# Altium PCB OpenBeacon.PcbDoc
Units mm, origin at the board's own origin, x right, y up, seen from the top; angles counter-clockwise.
Board outline 30 x 30 mm, 2 copper layers (Top Layer, Bottom Layer), stack 0.981 mm thick; 41 components, 33 nets, 159 pads, 58 vias.
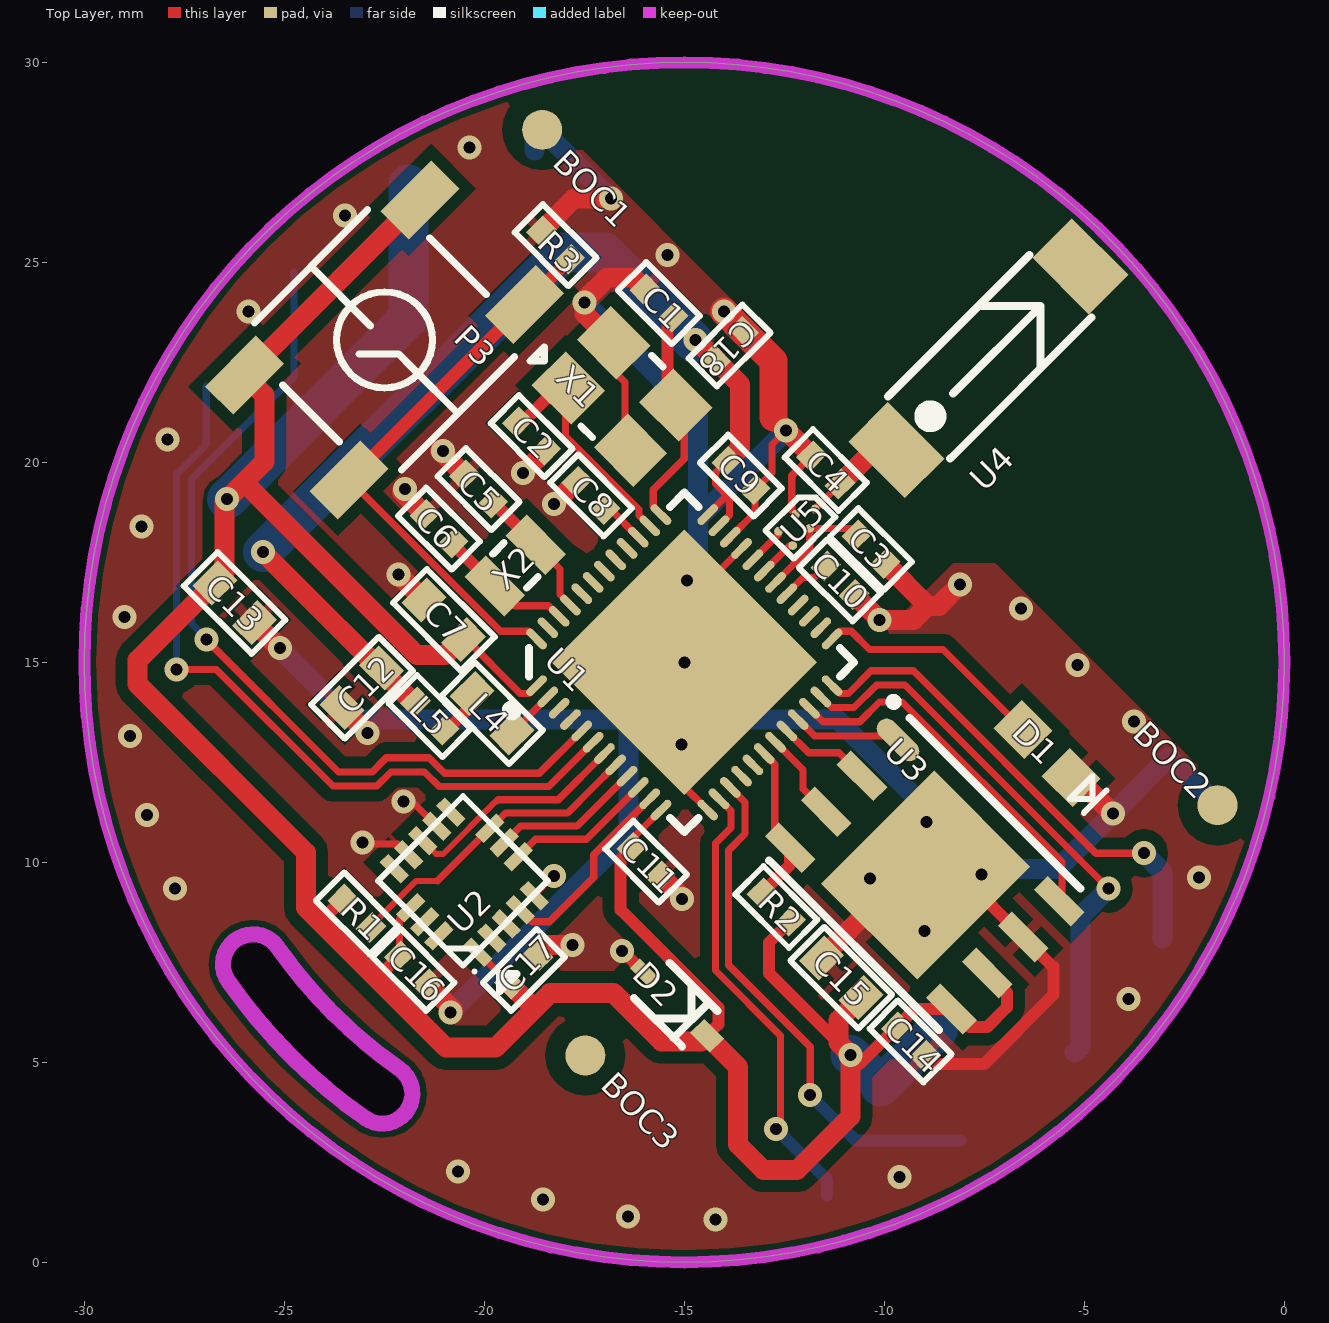
[diagram p0: Top Layer view]
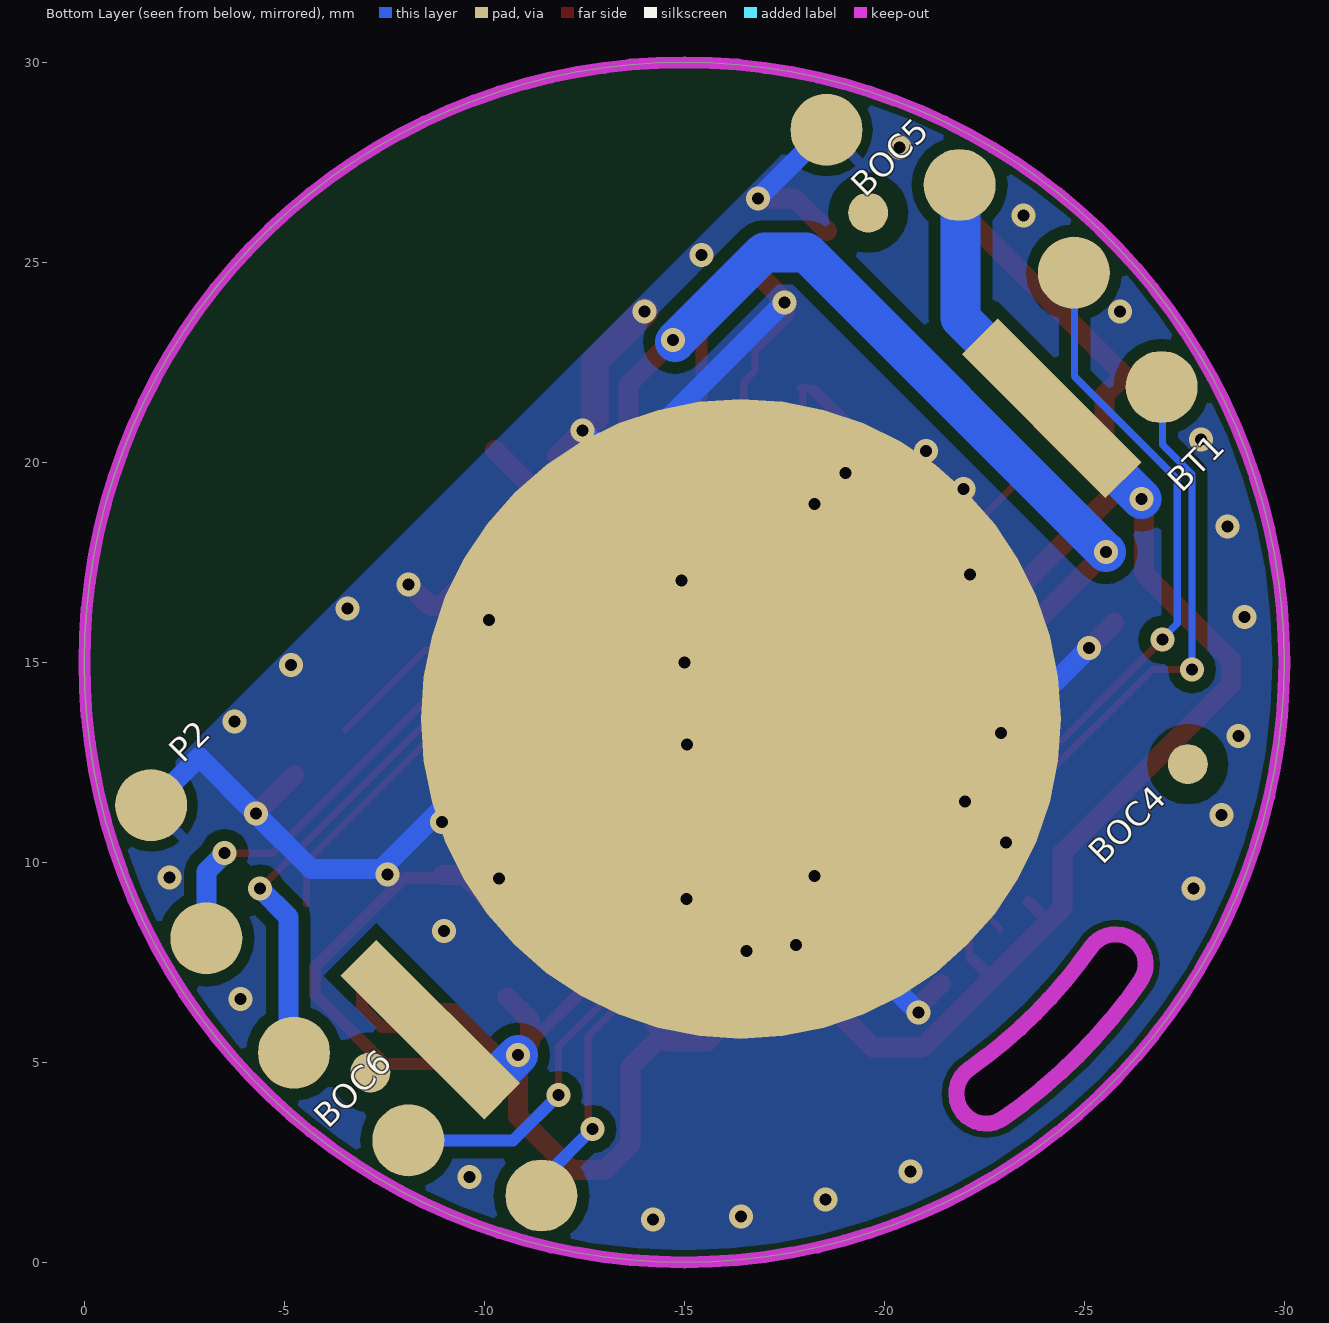
[diagram p1: Bottom Layer view, seen from below]

## Layer stack, top to bottom
Top Solder: solder mask 0.0102, Solder Resist, Dk 3.5
Top Layer: signal copper 0.0356
Dielectric 1: core 0.91, FR-4, Dk 4.2
Bottom Layer: signal copper 0.0356
Bottom Solder: solder mask 0.0102, Solder Resist, Dk 3.5

## Board outline
-15,0 cw(c-15,15) -30,15 cw(c-15,15) -15,30 cw(c-15,15) 0,15 cw(c-15,15)
cut-out: -26.475,7.175 -26.55,7.425 -26.525,7.675 -26.425,7.9 -26.275,8.05 -26.05,8.175 -25.85,8.225 -25.55,8.175 -25.3,8.05 -24.45,6.975 -23.9,6.35 -23.225,5.7 -22,4.75 -21.85,4.525 -21.8,4.25 -21.85,3.95 -21.95,3.725 -22.1,3.6 -22.25,3.5 -22.55,3.45 -22.775,3.525 -23,3.625 -23.55,4 -24.3,4.65 -25.25,5.6 -26,6.475

## Design rules (kind name [scope] priority, off if disabled: settings)
Clearance Clearance_BOC [InComponent('BOC1') OR InComponent('BOC2') OR InComponent('BOC3') OR InComponent('BOC4') OR InComponent('BOC5') OR InComponent('BOC6') vs IsRegion] p1: gap=0.5
Clearance Clearance_plane [(OnLayer('Keep-Out Layer')) vs IsRegion] p2: gap=0.15
Clearance Clearance_PWR [IsRegion] p3: gap=0.3
Clearance Clearance_ACC [InNet('ACC_/CS') OR InNet('ACC_INT1') vs InComponent('U2')] p4: gap=0.15
Clearance [All] p5: gap=0.15
ComponentClearance ComponentClearance_PROG [InComponent('BT1') vs InComponent('P2')] p1: gap=0.2 collisioncheckmode=3 verticalgap=0.2 showdistances=FALSE
ComponentClearance [All] p2: gap=0.254 collisioncheckmode=3 verticalgap=0.254 showdistances=FALSE
Height Height_TOP [(OnLayer('Top Layer'))] p1: minheight=0 maxheight=12.7 prefheight=1
Height Height_BOTTOM [(OnLayer('Bottom Layer'))] p2: minheight=0 maxheight=12.7 prefheight=4.06
Height [All] p3: minheight=0 maxheight=1 prefheight=1
HoleSize [All] p1: absolutevalues=TRUE maxlimit=2.54 minlimit=0.3 maxpercent=80.000 minpercent=20.000
MinimumSolderMaskSliver [All] p1 off: minsoldermaskwidth=0.075
PolygonConnect PolygonConnect_BAT [InNet('GND') AND InComponent('BT1')] p1: connectstyle=Direct reliefconductorwidth=0.254 reliefentries=4 polygonreliefangle="90 Angle" airgapwidth=0.254
PolygonConnect PolygonConnect_Via [IsVia] p2: connectstyle=Direct reliefconductorwidth=0.254 reliefentries=4 polygonreliefangle="90 Angle" airgapwidth=0.254
PolygonConnect [All] p3: connectstyle=Relief reliefconductorwidth=0.254 reliefentries=4 polygonreliefangle="90 Angle" airgapwidth=0.254
RoutingVias [All] p1: holewidth=0.3 width=0.6 viastyle="Through Hole" minholewidth=0.3 minwidth=0.6 maxholewidth=0.3 maxwidth=0.6
SilkToSilkClearance [All] p1 off: silktosilkclearance=0.05
SilkToSolderMaskClearance [IsPad] p1 off: minsilkscreentomaskgap=0.05 clearancetoexposedcopper=TRUE
SolderMaskExpansion SolderMaskExpansion_Via [IsVia] p1: expansion=-0.3
SolderMaskExpansion [All] p2: expansion=0.075
Width Width_small [InNet('ACC_/CS') OR InNet('ACC_INT1')] p1: maxlimit=1 minlimit=0.15 preferedwidth=0.18
Width [All] p2: maxlimit=1 minlimit=0.18 preferedwidth=0.3
23 further rules are at their usual default settings.

## Components (designator, comment, footprint, x,y, rotation, side; value= is the part's Value field where it differs from the comment)
BOC1 "Testpad" TESTPAD_1MM -18.554,28.312 r45 top
BOC2 "Testpad" TESTPAD_1MM -1.67,11.428 r45 top
BOC3 "Testpad" TESTPAD_1MM -17.475,5.171 r45 top
BOC4 "Testpad" TESTPAD_1MM -27.587,12.454 r135 bottom
BOC5 "Testpad" TESTPAD_1MM -19.596,26.243 r135 bottom
BOC6 "Testpad" TESTPAD_1MM -7.151,4.747 r135 bottom
BT1 "Battery Cell Holder" BAT-Holder_3034without-battery -16.414,13.586 r315 bottom
C1 "12pF" 0402[1005] -15.636,23.98 r135 top
C2 "12pF" 0402[1005] -18.818,20.657 r315 top
C3 "2.2nF" 0402[1005] -10.333,17.828 r315 top
C4 "0.8pF" 0402[1005] -11.464,19.808 r135 top
C5 "Cap 20pF" 0402[1005] -20.144,19.331 r315 top
C6 "Cap 20pF" 0402[1005] -21.134,18.341 r315 top
C7 "4.7uF" 0603[1608]_a -21.01,16.061 r135 top
C8 "100nF" 0402[1005] -17.333,19.172 r135 top
C9 "1nF" 0402[1005] -13.586,19.667 r315 top
C10 "47nF" 0402[1005] -11.111,17.051 r315 top
C11 "100nF" 0402[1005] -15.955,10.015 r315 top
C12 "1.0uF" 0603[1608]_a -23.061,14.364 r225 top
C13 "4.7µF" 0603[1608]_a -26.243,16.485 r135 top
C14 "100nF" 0402[1005] -9.343,5.525 r315 top
C15 "4.7uF" 0603[1608]_a -11.076,7.116 r135 top
C16 "100nF" 0402[1005] -21.771,7.31 r135 top
C17 "100nF" 0402[1005] -19.013,7.31 r45 top
C18 "100nF" 0402[1005] -13.869,22.92 r45 top
D1 "LED blue" LED_0603 -5.931,12.72 r135 top
D2 "Schottky" SC-90A -15.212,6.444 r315 top
L4 "10uH" 0603[1608]_a -19.808,13.727 r135 top
L5 "15nH" 0402[1005] -21.364,13.656 r135 top
P2 "PROG" HDR1X9_round_custom-SMD_without-3D -15,15 r135 bottom
P3 "Taktil_PTS252" taktil_PTS525 -22.495,23.061 r225 top locked
R1 "12k" 0402[1005] -23.185,8.724 r135 top
R2 "12k" 0402[1005] -12.702,8.884 r135 top
R3 "12k" 0402[1005] -18.217,25.43 r135 top
U1 "nRF51822" QFN-48 -15,15 r45 top locked
U2 "LIS3DH" LGA-16 -20.498,9.502 r135 top
U3 "AT45DB641E" UDFN-8MA1 -8.99,9.697 r315 top
U4 "ANT-2.54-CHP" ANT-CHP_rainsun -9.697,20.303 r45 top
U5 "BAL-NRF01D3" BAL-NRF01D3 -12.101,18.465 r45 top
X1 "XTAL_4Pin" SMD3225 -16.556,21.647 r315 top
X2 "XTAL-2pin" ABS06 -19.225,17.422 r45 top

## Footprints (in the part's own frame and the unit in brackets; to place one, negate y for a bottom-side part, rotate by r counter-clockwise, add the part's x,y. Pads: shape width x height; smd on the part's side, far side on the other; paste and mask are expansions set on the pad)
0402[1005] [mm] "0402 (1005), body 1.0 x 0.5 mm"
  rect 0.5x0.6 smd: 1(-0.5,0) 2(0.5,0)
  silkscreen extent -0.95,-0.5 0.95,0.5, body extent -0.5,-0.25 0.5,0.25, height 0.35
0603[1608]_a [mm] "Chip Capacitor; Body 1.6 x 0.8 mm (LxW typ)"
  rect 0.7x0.9 smd: 1(-0.7,0) 2(0.7,0)
  silkscreen extent -1.2,-0.6 1.2,0.6, body extent -0.8,-0.4 0.8,0.4, height 0.8
ABS06 [mm] "Low Profile Crystal 2.0 x 1.2 mm"
  rect 0.75x1.4 smd: 1(-0.725,0) 2(0.725,0)
  silkscreen extent -0.2,-0.6 0.2,0.6, body extent -1,-0.6 1,0.6, height 0.6
ANT-CHP_rainsun [mm] "ANT-2.45-CHP"
  rect 1.4x2 smd: 1(0,0) 2(6.5,0)
  silkscreen extent 0.8,-1.1 5.8,1.1, body extent -0.25,-1.25 6.75,1.25, height 1
BAL-NRF01D3 [mm]
  round 0.22 smd paste+0 mask+0.05: A2(0.085,0.25) A3(-0.519,0.25) B1(0.518,0) C2(0.085,-0.25) C3(-0.519,-0.25)
  silkscreen extent -0.74,-0.5 0.74,0.5, body extent -0.75,-0.5 0.75,0.5, height 0.63
BAT-Holder_3034without-battery [mm] "Coin Cell 20mm Holder from Keystone"
  round 16 smd paste-9: M(0,0)
  rect 1.27x5.08 smd: P1(-10.985,0) P2(10.985,0)
  body extent -11.5,-7.74 11.74,8.74, height 4.1
HDR1X9_round_custom-SMD_without-3D [mm] "SMD Pads; 1x9 Position, custom round"
  round 1.8 smd paste-0.9: 1(-11.951,6.9) 2(-13.33,3.572) 3(-13.8,0) 4(-13.33,-3.572) 5(-11.951,-6.9) 6(11.926,6.9) 7(13.305,3.572) 8(13.775,0) 9(13.305,-3.572)
  body extent -14.79,-7.9 14.77,7.9, height 5
LED_0603 [mm] "0603-Pol. SMD Chip LED, Body 1.6 x 0.8 mm (LxW typ)"
  rect 1.1x1 smd: A(0.85,0) C(-0.85,0)
  silkscreen extent -1.7,-0.4 -1.2,0.4, body extent -0.8,-0.4 0.8,0.4, height 0.8
LGA-16 [mm] "16-lead LGA"
  rect 0.75x0.3 smd: 1(-1.475,1) 2(-1.475,0.5) 3(-1.475,0) 4(-1.475,-0.5) 5(-1.475,-1) 9(1.475,-1) 10(1.475,-0.5) 11(1.475,0) 12(1.475,0.5) 13(1.475,1)
  rect 0.3x0.75 smd: 6(-0.5,-1.4) 7(0,-1.4) 8(0.5,-1.4) 14(0.5,1.4) 15(0,1.4) 16(-0.5,1.4)
  silkscreen extent -2.55,-1.5 1.55,1.5, body extent -1.45,-1.5 1.55,1.5, height 1
QFN-48 [mm] "QFN40P600X600X90-48N"
  oval 0.65x0.2 smd mask+0.075: 1(-3.025,2.2) 2(-3.025,1.8) 3(-3.025,1.4) 4(-3.025,1) 5(-3.025,0.6) 6(-3.025,0.2) 7(-3.025,-0.2) 8(-3.025,-0.6) 9(-3.025,-1) 10(-3.025,-1.4) 11(-3.025,-1.8) 12(-3.025,-2.2) 25(3.025,-2.2) 26(3.025,-1.8) 27(3.025,-1.4) 28(3.025,-1) 29(3.025,-0.6) 30(3.025,-0.2) 31(3.025,0.2) 32(3.025,0.6) 33(3.025,1) 34(3.025,1.4) 35(3.025,1.8) 36(3.025,2.2)
  oval 0.2x0.65 smd mask+0.075: 13(-2.2,-3.025) 14(-1.8,-3.025) 15(-1.4,-3.025) 16(-1,-3.025) 17(-0.6,-3.025) 18(-0.2,-3.025) 19(0.2,-3.025) 20(0.6,-3.025) 21(1,-3.025) 22(1.4,-3.025) 23(1.8,-3.025) 24(2.2,-3.025) 37(2.2,3.025) 38(1.8,3.025) 39(1.4,3.025) 40(1,3.025) 41(0.6,3.025) 42(0.2,3.025) 43(-0.2,3.025) 44(-0.6,3.025) 45(-1,3.025) 46(-1.4,3.025) 47(-1.8,3.025) 48(-2.2,3.025)
  rect 4.7x4.7 smd paste-2.5: 49(0,0)
  silkscreen extent -4.02,-3 3,3, body extent -3,-3 3,3, height 0.9
SC-90A [mm] "Schottky Barrier Diode"
  rect 0.7x0.35 smd: A(-1.1,0)
  rect 0.7x0.5 smd: C(1.1,0)
  silkscreen extent -0.85,-0.62 0.85,0.62, body extent -0.85,-0.62 0.85,0.62, height 0.7
SMD3225 [mm] "thin crystal"
  rect 1.4x1.2 smd: 1(-1.1,-0.8) 2(1.1,-0.8) 3(1.1,0.8) 4(-1.1,0.8)
  silkscreen extent -2.25,-1.25 0.2,1.25, body extent -1.6,-1.25 1.6,1.25, height 0.55
taktil_PTS525 [mm] "Microminiature Tact Switch for SMT"
  rect 1.8x1 smd: 1(-3.1,1.85) 2(3.1,1.85) 3(-3.1,-1.85) 4(3.1,-1.85)
  silkscreen extent -2.6,-2.6 2.6,2.6, body extent -2.6,-2.6 2.6,2.6, height 0.9
TESTPAD_1MM [mm] "Testpad 1mm"
  round 1 smd paste-0.6 mask+0.5: 1(0,0)
  body extent -0.5,-0.5 0.5,0.5, height 0.1
UDFN-8MA1 [mm] "MO-229 (JEDEC), body 6x5mm"
  rect 3.4x4 smd paste-2: 0(0.025,0.005)
  oval 1.3x0.5 smd: 1(-2.85,1.905)
  rect 1.3x0.5 smd: 2(-2.85,0.635) 3(-2.85,-0.635) 4(-2.85,-1.905) 5(2.85,-1.905) 6(2.85,-0.635) 7(2.85,0.635) 8(2.85,1.905)
  silkscreen extent -3.7,-2.5 3,2.6, body extent -3,-2.5 3,2.5, height 1

## Part data
BT1: library part Battery_Cell, "Battery Cell"
C1 C2 C3 C4 C5 C6 C7 C8 C9 C10 C11 C12 C14 C15 C16 C17 C18: library part "Cap Semi", "Capacitor (Semiconductor SIM Model)"
C13: library part C0603-4µ7, "Capacitor, X5R, ±10%"
D1: library part LED, "LED"
D2: library part Diode_Shottky, "Schottky barrier diode"
L4 L5: library part COIL, "Inductor / Spule"
P2: library part "Header 9", "Header, 9-Pin"
P3: "Taster"
R1 R2 R3: library part Res, "Resistor"
U2: "LIS3DH, MEMS digital output motion sensor"
U3: "serial interface Flash memory (1.7V-3.6V)"
U4: library part ANT-CHP, "ANT-2.54-CHP, 2.45GHz Ultra-Compact Chip Antenna"
U5: "ST BAL-NRF01D31"
X1: "ABM8 ceramic crystal"
X2: library part XTAL_2Pin, "Crystal"

## Via types
v1: diameter 0.6, hole 0.3, Top Layer to Bottom Layer, tented both sides, 58 vias

## Nets (pads, with @x,y where several pads share a name; then routed paths per layer and width w, separated by ;. In a path a pad name is that pad's centre, name@x,y a point inside that pad or via, vN(x,y) a via of type N, cw(c..) or ccw(c..) an arc to the next point about the centre after c; other vN are vias at no path point)
ACC_/CS: R1.1 U1.8 U2.8 | length 7.9
  Top Layer w0.15: R1.1@-22.902,8.3 -22.902,8.336 -21.7,9.538 -21.17,9.538
  Top Layer w0.18: -21.17,9.538 U2.8 -19.472,11.235 -17.917,11.235 -17.333,11.818 U1.8
ACC_INT1: U1.7 U2.11 | length 5.7
  Top Layer w0.15: U2.11@-21.523,10.528 -21.205,10.209 -21.028,10.209 -19.702,11.535 -19.685,11.535
  Top Layer w0.18: -19.685,11.535 -19.655,11.565 -18.153,11.565 U1.7
ACC_MISO: U1.9 U2.7 | length 3.8
  Top Layer w0.18: U2.7 -19.095,10.905 -17.681,10.905 U1.9
ACC_MOSI: U1.10 U2.6 | length 3.7
  Top Layer w0.18: U2.6 -18.718,10.575 -17.445,10.575 U1.10
ACC_SCK: U1.11 U2.4 | length 5
  Top Layer w0.18: U2.4@-19.119,8.83 -18.801,8.512 -18.376,8.512 -17.263,9.626 -17.263,10.192 U1.11
AIN2: P2.8 U1.5 | length 21.9
  Top Layer w0.18: v1(-26.95,15.566) -23.644,12.26 -22.803,12.26 -22.449,12.614 -21.382,12.614 -20.993,12.225 -18.624,12.225 U1.5
  Bottom Layer w0.18: v1(-26.95,15.566) -26.95,15.601 -27.321,15.972 -27.321,19.579 -24.758,22.142 P2.8@-24.758,24.758
AIN3: P2.9 U1.6 | length 19.8
  Top Layer w0.18: v1(-27.693,14.823) -26.703,14.823 -23.786,11.906 -22.69,11.906 -22.336,12.26 -21.495,12.26 -21.129,11.895 -18.388,11.895 U1.6
  Bottom Layer w0.18: v1(-27.693,14.823) -27.693,19.702 -26.951,20.444 P2.9@-26.951,21.9
ANT1: U1.32 U5.A3 | length 1
  Top Layer w0.18: U1.32 -12.644,18.204 U5.A3
ANT2: U1.31 U5.C3 | length 1
  Top Layer w0.18: U1.31 -12.362,17.921 U5.C3
AVDD: C9.1 C12.1 C18.1 L5.2 U1.35 U1.36 | length 26.5
  Top Layer w0.18: U1.36 -14.01,19.101 -13.869,19.101 ; U1.35 -13.869,18.677 -13.869,19.101 ; C9.1 -14.222,19.738 -14.222,19.455 -13.869,19.101
  Top Layer w0.5: v1(-25.536,17.758) L5.2@-21.753,13.975 ; v1(-14.717,23.061) -13.603,21.947 -13.603,20.356 C9.1
  Bottom Layer w1: v1(-25.536,17.758) -18.044,25.25 -17,25.25 v1@-14.764,23.014
FLASH_/CS: R2.2 U1.18 U3.4 | length 3.9
  Top Layer w0.18: U1.18 -12.737,12.454 -12.737,10.75 U3.4@-12.423,10.436
  Top Layer w0.3: R2.2 -12.352,9.941 U3.4
FLASH_/RESET: U1.19 U3.3 | length 2.2
  Top Layer w0.18: U1.19 -12.03,12.313 -12.03,11.839 U3.3@-11.525,11.334
FLASH_MISO: U1.22 U3.8 | length 9.4
  Top Layer w0.18: U1.22 -11.535,13.515 -10.616,13.515 -10.121,14.01 -9.555,14.01 -5.557,10.011 U3.8@-5.557,8.958
FLASH_MOSI: U1.21 U3.1 | length 2.5
  Top Layer w0.18: U1.21 -11.747,13.162 -10.011,13.162 U3.1@-9.87,13.303
FLASH_SCK: U1.20 U3.2 | length 2.2
  Top Layer w0.18: U1.20 -11.889,12.737 -11.132,12.737 U3.2@-10.627,12.232
GND: BT1.M C1.2 C2.2 C3.2 C4.2 C5.1 C6.1 C7.2 C8.2 C9.2 C10.2 C11.2 C12.2 C13.1 C14.2 C15.2 C16.1 C17.2 C18.2 D1.C D2.A P2.1 P2.6 R3.2 U1.13 U1.33 U1.34 U1.49 U2.5 U2.10 U2.12 U3.0 U3.7 U5.A2 X1.2 X1.4 | length 110.2
  Top Layer w0.18: v1@-23.008,10.457 -22.159,10.457 U2.12@-21.877,10.174 ; v1@-21.947,11.517 -21.806,11.517 U2.10@-21.17,10.881 ; U2.5@-18.765,9.184 -18.306,9.644 v1@-18.306,9.714 ; X1.4 -16.768,22.283 -16.485,22 -16.485,20.445 X1.2 ; U1.13 -15,11.889 v1(-15,15) -15,16.414 U1.33 ; U1.34 -13.232,18.748 C9.2 -12.808,19.738 -12.808,20.445 v1(-12.454,20.798) ; U5.A2 -12.313,18.798 -12.313,19.667 C4.2
  Top Layer w0.3: v1(-16.556,7.788) D2.A ; C14.2 -8.777,4.959 -7.505,4.959 -5.772,6.691 -5.772,7.377 U3.7 -8.007,9.612 U3.0@-8.968,9.612
  Top Layer w0.5: C13.1 v1(-25.112,15.354) ; C12.2 v1(-22.92,13.232) ; v1(-22.142,17.192) C7.2@-21.541,16.591 ; v1@-22.053,19.26 C6.1 ; C16.1 v1@-20.781,6.32 ; v1@-21.108,20.294 C5.1 ; v1@-18.96,19.808 C2.2 ; C17.2 -18.394,7.929 v1(-17.793,7.929) ; R3.2 -17.758,26.597 v1(-16.838,26.597) ; v1@-18.182,19.031 C8.2 ; X1.4 -17.5,23.723 -17.5,24.05 -16.933,24.617 -16.273,24.617 C1.2 ; C11.2 v1@-15.053,9.113 ; -12.773,21.116 v1(-12.454,20.798) C4.2 ; C15.2 -9.499,9.683 U3.0 ; C10.2 v1(-10.121,16.061) -9.272,16.061 -8.919,16.414 ; C3.2 -8.919,16.414 ; v1(-8.106,16.945) -8.636,16.414 -8.919,16.414 ; D1.C@-5.26,12.189 v1(-4.287,11.217)
  Top Layer w0.7: v1(-14.01,23.768) C18.2 -12.773,22.531 -12.773,21.116
  Bottom Layer w0.5: v1(-25.112,15.354) BT1.M@-23.33,13.572 ; BT1.M@-22.92,13.572 BT1.M@-16.401,13.572 ; v1(-20.851,6.25) -16.401,10.7 BT1.M@-16.401,13.572 ; P2.6@-18.748,27.799 -18.748,28.161 P2.6@-18.576,28.333 ; P2.6 v1(-16.838,26.597) ; v1(-17.5,24) -14.664,21.164 BT1.M@-14.664,18.589 ; v1(-12.454,20.798) BT1.M@-14.664,18.589 ; P2.1@-1.667,11.424 -2.874,12.631 v1(-4.287,11.217) -5.666,9.838 -7.434,9.838 -11.168,13.572 BT1.M@-16.401,13.572 ; BT1.M@-16.401,13.572 -14.664,15.309 BT1.M@-14.664,18.589
  other v1: -14.222,1.07 -16.414,1.141 -18.536,1.565 -9.626,2.131 -20.657,2.272 -3.898,6.585 -8.99,8.282 -15.053,9.078 -27.728,9.343 -10.361,9.598 -2.131,9.626 -18.253,9.661 -7.575,9.697 -23.043,10.492 -8.947,11.012 -28.435,11.182 -22.018,11.517 -15.071,12.949 -28.859,13.162 -3.757,13.515 -5.171,14.929 -29.001,16.131 -6.585,16.344 -14.929,17.051 -28.576,18.394 -18.253,18.96 -21.983,19.331 -19.031,19.738 -21.037,20.277 -27.922,20.568 -25.889,23.768 -15.424,25.182 -23.485,26.172 -20.374,27.869
LED: D1.A U1.25 | length 5.9
  Top Layer w0.18: U1.25 -11.111,15.778 -10.828,15.778 -10.368,15.318 -8.53,15.318 D1.A
NetC1_1: C1.1 U1.37 X1.3 | length 5.4
  Top Layer w0.18: U1.37 -15.778,18.889 -15.778,19.313 -15,20.091 -15,21.223 X1.3 X1.3@-15.424,21.647
  Top Layer w0.3: X1.3@-15.424,21.647 C1.1@-15.424,23.485
NetC2_1: C2.1 U1.38 X1.1 | length 5.8
  Top Layer w0.18: X1.1@-18.182,21.859 X1.1 ; X1.1@-17.97,21.788 -17.97,20.657 -16.131,18.818 -16.131,18.677 U1.38
  Top Layer w0.3: C2.1@-19.172,20.869 X1.1@-18.253,21.788
NetC3_1: C3.1 U1.30 U5.C2 | length 3
  Top Layer w0.18: U1.30 -11.864,17.853 U5.C2 -10.853,18.348 C3.1
NetC4_1: C4.1 U4.1 U5.B1 | length 2.1
  Top Layer w0.18: U5.B1 C4.1
  Top Layer w0.5: C4.1 U4.1@-10.262,20.303
NetC5_2: C5.2 U1.45 X2.2 | length 3.3
  Top Layer w0.18: C5.2@-19.72,18.907 C5.2@-19.685,18.907 ; X2.2 -18.111,17.333 -18.111,16.697 U1.45
  Top Layer w0.3: C5.2@-19.685,18.907 X2.2
NetC6_2: C6.2 U1.46 X2.1 | length 4
  Top Layer w0.18: C6.2@-20.71,17.881 C6.2@-20.71,17.917 ; X2.1@-19.26,16.432 X2.1 -19.243,16.414 -18.394,16.414 U1.46
  Top Layer w0.3: C6.2@-20.71,17.881 X2.1
NetC8_1: C8.1 U1.39 | length 1.3
  Top Layer w0.18: C8.1@-17.121,18.818 -16.838,18.818 U1.39
NetC10_1: C10.1 U1.29 | length 1.3
  Top Layer w0.18: U1.29 -12.03,17.121 -11.747,17.121 C10.1
NetL4_1: L4.1 U1.2 | length 1.3
  Top Layer w0.18: L4.1 U1.2
NetL4_2: L4.2 L5.1 | length 1.2
  Top Layer w0.3: L5.1@-20.975,13.268 L4.2@-20.127,14.116
RX: P2.5 U1.14 | length 11.4
  Top Layer w0.18: U1.14 -13.833,11.288 -13.833,10.863 -14.222,10.475 -14.222,7.293 -12.596,5.666 -12.596,3.439 v1(-12.702,3.333)
  Bottom Layer w0.3: v1(-12.702,3.333) -11.428,2.059 P2.5
SWDCLK: P2.2 U1.24 | length 12.3
  Top Layer w0.18: U1.24 -11.111,14.222 -10.899,14.222 -10.333,14.788 -9.272,14.788 -4.712,10.227 v1(-3.51,10.227)
  Bottom Layer w0.5: v1(-3.51,10.227) -3.049,9.766 P2.2
SWDIO: P2.3 U1.23 | length 14.1
  Top Layer w0.18: U1.23 -11.323,13.869 -10.757,13.869 -10.192,14.434 -9.485,14.434 v1(-4.393,9.343)
  Bottom Layer w0.5: P2.3 -5.101,5.383 -5.101,8.636 v1(-4.393,9.343)
SWITCH: P3.1 P3.2 R3.1 U1.48 | length 14.1
  Top Layer w0.18: P3.2 -19.596,15.778 -18.889,15.778 U1.48
  Top Layer w0.3: P3.2@-23.803,19.349 P3.2@-23.662,19.49 ; P3.2@-23.309,19.632 R3.1@-17.97,24.97
TX: P2.4 U1.15 | length 13.1
  Top Layer w0.18: U1.15 -13.48,11.5 -13.48,10.717 -13.892,10.305 -13.892,7.429 -11.853,5.39 v1(-11.853,4.181)
  Bottom Layer w0.3: v1(-11.853,4.181) -10.721,3.049 P2.4
VBAT: BT1.P1 BT1.P2 C7.1 C11.1 C13.2 C14.1 C15.1 C16.2 C17.1 D2.C P2.7 P3.3 P3.4 R1.2 R2.1 U1.1 U1.12 U2.1 U2.14 U3.5 U3.6 | length 89.9
  Top Layer w0.18: C16.2@-22.195,7.593 C16.2 -22.124,8.583 U2.14 ; C7.1@-20.515,15.636 -19.101,14.222 -18.889,14.222 U1.1 ; U2.1@-20.18,7.77 C17.1 ; C11.1 -16.308,10.581 U1.12
  Top Layer w0.3: -24.086,8.53 R1.2@-23.609,9.007 ; -22.69,7.098 C16.2@-22.195,7.593 ; C11.1 -16.591,10.086 -16.591,8.813 -14.151,6.373 -14.151,5.949 D2.C ; R2.1 -12.879,8 -12.879,7.222 v1(-10.846,5.189) ; v1@-10.722,5.065 -10.616,4.959 C14.1 -9.241,6.334 U3.5 -7.865,5.878 -7.434,5.878 -6.939,6.373 -6.939,6.748 U3.6
  Top Layer w0.5: -25.996,19.49 -21.682,15.177 -20.975,15.177 C7.1@-20.515,15.636 ; P3.4 -25.501,21.682 -25.501,20.007 -26.49,19.017 -26.49,17.227 C13.2 -28.665,15.053 -28.665,14.452 -24.458,10.245 -24.458,8.866 -20.957,5.366 -19.72,5.366 -18.359,6.727 -16.768,6.727 -15.566,5.525 -14.576,5.525 D2.C -13.656,4.888 -13.656,2.944 -13.02,2.307 -12.185,2.307 -10.846,3.646 v1(-10.846,5.189) ; P3.4@-25.854,22.319 P3.3 ; C17.1 -18.783,6.373 ; v1@-10.722,5.065 -11.146,5.489 -11.146,6.055 C15.1
  Bottom Layer w1: v1(-26.431,19.077) -21.9,23.608 P2.7@-21.9,26.951 ; v1(-10.846,5.189) BT1.P2@-10.386,4.729 ; BT1.P2@-10.099,4.393 BT1.P2@-8.66,5.832
pads on no net: BOC1.1 BOC2.1 BOC3.1 BOC4.1 BOC5.1 BOC6.1 U1.3 U1.4 U1.16 U1.17 U1.26 U1.27 U1.28 U1.40 U1.41 U1.42 U1.43 U1.44 U1.47 U2.2 U2.3 U2.9 U2.13 U2.15 U2.16 U4.2

## Polygon pours and split planes (outlines as drawn)
GND on Top Layer "Top Layer-No Net" (solid, remove dead copper, pour order 4): -20.48,30.733 0.733,9.52 -15,-6.213 -36.213,15 -20.48,30.733
GND on Bottom Layer "Top Layer-No Net" (solid, remove dead copper, pour order 3): -20.48,30.733 0.733,9.52 -15,-6.213 -36.213,15 -20.48,30.733

## Keep-outs
Keep-Out Layer:
  circle w0.3: c-15,15 r15
  lines w0.4: -26.396,7.02 ccw(c-15,15) -22.98,3.604 ccw(c-22.55,4.218) -22.12,4.832 cw(c-15,15) -25.168,7.88 ccw(c-25.782,7.45) -26.396,7.02

## Other copper
Top Layer:
  pour cut-out: -12.525,23.132 -12.525,21.718 -15,19.243 -10.757,15 -8.282,17.475 -6.868,17.475

## Silkscreen, mask and mechanical layers (free items; w line width, h text height)
Mechanical 2:
  circle w0.01: c-15,15 r15
  lines w0.01: -26.396,7.02 cw(c-25.782,7.45) -25.168,7.88 ccw(c-15,15) -22.12,4.832 cw(c-22.55,4.218) -22.98,3.604 cw(c-15,15) -26.396,7.02
Mechanical 4:
  text "o" at -10.25,7.75 h18 r315

## Dimensions
-15,0 to -15,30 on Mechanical 3